# EAGLE board CT_schematic (EAGLE 7.6.0)

Size 100 x 80 mm. Coordinates in mm from the lower left corner, seen from the top.
Outline: 0,0 100,0 100,80 0,80 0,0
Copper layers (1*16): Top 0.035mm / dielectric 1.5mm / Bottom 0.035mm
Design rules "default": minimum track width 10mil, minimum drill 24mil, track to track 8mil, track to pad 8mil, pad to pad 8mil, via to via 8mil, smd to smd 8mil, copper to edge 40mil, drill to drill 8mil, minimum pad ring 10mil, minimum via ring 8mil, stop-mask expansion 4mil, vias tented up to drill 0mil, thermal gap 10mil

## Footprints (pad centres in the part's own frame; a part is rotated, then mirrored left to right if it is on the bottom)
C0603 = smd 0.8 x 0.8: 1 -0.762,0; 2 0.762,0
C0402 = smd 0.5 x 0.5: 1 -0.508,0; 2 0.508,0
C1206 = smd 1.3 x 1.6: 1 -1.524,0; 2 1.524,0
C0805 = smd 1.2 x 1.3: 1 -1.016,0; 2 1.016,0
EXV-9B = smd 2.718 x 1.778: 1 -2.108,0; 2 2.108,0
EXV-9H = smd 3.505 x 1.676: 1 -2.857,0; 2 2.857,0
L0603 = smd 0.8 x 0.8: 1 -0.762,0; 2 0.762,0
PJ-037B_PACKAGE = drill 3.7 square: 1 12,0 | drill 3.2 square: 2 6,0
R0603 = smd 0.8 x 0.8: 1 -0.762,0; 2 0.762,0
WLCSP64 = smd 0.34 x 0.34: A1 -1.75,1.75; A2 -1.25,1.75; A3 -0.75,1.75; A4 -0.25,1.75; A5 0.25,1.75; A6 0.75,1.75; A7 1.25,1.75; A8 1.75,1.75; B1 -1.75,1.25; B2 -1.25,1.25; B3 -0.75,1.25; B4 -0.25,1.25; B5 0.25,1.25; B6 0.75,1.25; B7 1.25,1.25; B8 1.75,1.25; C1 -1.75,0.75; C2 -1.25,0.75; C3 -0.75,0.75; C4 -0.25,0.75; C5 0.25,0.75; C6 0.75,0.75; C7 1.25,0.75; C8 1.75,0.75; D1 -1.75,0.25; D2 -1.25,0.25; D3 -0.75,0.25; D4 -0.25,0.25; D5 0.25,0.25; D6 0.75,0.25; D7 1.25,0.25; D8 1.75,0.25; E1 -1.75,-0.25; E2 -1.25,-0.25; E3 -0.75,-0.25; E4 -0.25,-0.25; E5 0.25,-0.25; E6 0.75,-0.25; E7 1.25,-0.25; E8 1.75,-0.25; F1 -1.75,-0.75; F2 -1.25,-0.75; F3 -0.75,-0.75; F4 -0.25,-0.75; F5 0.25,-0.75; F6 0.75,-0.75; F7 1.25,-0.75; F8 1.75,-0.75; G1 -1.75,-1.25; G2 -1.25,-1.25; G3 -0.75,-1.25; G4 -0.25,-1.25; G5 0.25,-1.25; G6 0.75,-1.25; G7 1.25,-1.25; G8 1.75,-1.25; H1 -1.75,-1.75; H2 -1.25,-1.75; H3 -0.75,-1.75; H4 -0.25,-1.75; H5 0.25,-1.75; H6 0.75,-1.75; H7 1.25,-1.75; H8 1.75,-1.75
SOT-23-8 = smd 0.4 x 1.2: 1 -0.975,-1.3; 2 -0.325,-1.3; 3 0.325,-1.3; 4 0.975,-1.3; 5 0.975,1.3; 6 0.325,1.3; 7 -0.325,1.3; 8 -0.975,1.3
182-009-MALE = drill 1.194 pad 1.524 octagon: 1 -5.537,10.923; 2 -2.769,10.923; 3 0,10.923; 4 2.769,10.923; 5 5.537,10.923; 6 -4.153,8.08; 7 -1.384,8.08; 8 1.384,8.08; 9 4.153,8.08 | hole 3.048: -12.446,9.501; 12.446,9.501
ABLS-25.000MHZ-B2F-T = smd 5.6 x 2.8: 1 -3.81,0; 2 5.69,0
ASEK = smd 1.4 x 1: 1 -1.1,-0.8; 2 1.1,-0.8; 3 1.1,0.8; 4 -1.1,0.8
WSON-8 = smd 0.3 x 0.6: 1 -0.75,0; 2 0.05,0; 3 0.85,0; 4 1.65,0; 5 1.65,3.8; 6 0.85,3.8; 7 0.05,3.8; 8 -0.75,3.8 | smd 3 x 2.6: PAD 0.45,1.9
LP2954 = smd 1.6 x 0.6: 1 -2.475,1.905 | smd 1.55 x 0.6: 2 -2.475,0.635; 3 -2.475,-0.635; 4 -2.475,-1.905; 5 2.475,-1.905; 6 2.475,-0.635; 7 2.475,0.635; 8 2.475,1.905
SON-6 = smd 0.55 x 0.3: 1 -0.355,0.5 | smd 0.52 x 0.3: 2 -0.37,0; 3 -0.37,-0.5; 4 0.37,-0.5; 5 0.37,0; 6 0.37,0.5
SW_4-1437565-2 = smd 1.4 x 2.1: 1 -2.23,4.55; 2 -2.23,-4.55; 3 2.23,4.55; 4 2.23,-4.55
LGM67K-G1J2-24-Z = smd 0.8 x 1.4: A -2,0; C 0,0
NC7SZ125M5X = smd 1.3 x 0.7: 1 -1.3,0.95; 2 -1.3,0; 3 -1.3,-0.95; 4 1.3,-0.95; 5 1.3,0.95

## Placement (x,y rotation side)
C1  1e-06  [C0603]  -43.18,59.69 0 top  (outside the outline)
C2  1e-07  [C0603]  -46.99,59.69 0 top  (outside the outline)
C3  1e-07  [C0603]  -50.8,59.69 0 top  (outside the outline)
C4  1e-07  [C0603]  -54.61,59.69 0 top  (outside the outline)
C5  1e-07  [C0603]  -58.42,59.69 0 top  (outside the outline)
C6  4.7e-06  [C0603]  -39.37,59.69 0 top  (outside the outline)
C7  1e-07  [C0603]  -62.23,59.69 0 top  (outside the outline)
C8  1e-07  [C0603]  -66.04,59.69 0 top  (outside the outline)
C9  1e-08  [C0603]  -15.24,64.77 0 top  (outside the outline)
C10  1e-06  [C0603]  -19.05,64.77 0 top  (outside the outline)
C11  1e-11  [C0402]  -45.72,64.77 0 top  (outside the outline)
C12  1e-11  [C0402]  -49.53,64.77 0 top  (outside the outline)
C13  1e-07  [C0402]  -53.34,64.77 0 top  (outside the outline)
C14  1e-08  [C0402]  -57.15,64.77 0 top  (outside the outline)
C15  1e-08  [C0402]  -60.96,64.77 0 top  (outside the outline)
C16  1e-05  [C1206]  -49.53,45.72 0 top  (outside the outline)
C17  1e-05  [C0805]  -30.48,53.34 0 top  (outside the outline)
C18  1e-06  [EXV-9B]  -60.96,45.72 0 top  (outside the outline)
C19  2.2e-06  [EXV-9B]  -16.51,53.34 0 top  (outside the outline)
C20  1e-07  [C0402]  -64.77,64.77 0 top  (outside the outline)
C21  0.0001  [EXV-9H]  -53.34,38.1 0 top  (outside the outline)
C22  0.0001  [EXV-9H]  -64.77,38.1 0 top  (outside the outline)
C23  1e-08  [C0402]  -68.58,64.77 0 top  (outside the outline)
F1  240.0  [L0603]  -22.86,64.77 0 top  (outside the outline)
J1  PJ-037B  [PJ-037B_PACKAGE]  -67.31,7.62 0 top  (outside the outline)
R2  1000.0  [R0603]  -26.67,64.77 0 top  (outside the outline)
R4  4700.0  [R0603]  -30.48,64.77 0 top  (outside the outline)
R5  10000.0  [R0603]  -15.24,59.69 0 top  (outside the outline)
R6  10000.0  [R0603]  -20.32,59.69 0 top  (outside the outline)
R7  120.0  [R0603]  -34.29,64.77 0 top  (outside the outline)
R8  100000.0  [R0603]  -40.64,53.34 0 top  (outside the outline)
R9  806.0  [R0603]  -38.1,64.77 0 top  (outside the outline)
R10  1000.0  [R0603]  -41.91,64.77 0 top  (outside the outline)
R11  100000.0  [R0603]  -45.72,53.34 0 top  (outside the outline)
R12  100000.0  [R0603]  -50.8,53.34 0 top  (outside the outline)
R13  164658.62  [R0603]  -35.56,53.34 0 top  (outside the outline)
R14  100000.0  [R0603]  -55.88,53.34 0 top  (outside the outline)
R15  10000.0  [R0603]  -25.4,59.69 0 top  (outside the outline)
R16  10000.0  [R0603]  -30.48,59.69 0 top  (outside the outline)
R17  82000.0  [R0603]  -35.56,59.69 0 top  (outside the outline)
R18  300000.0  [R0603]  -60.96,53.34 0 top  (outside the outline)
R19  120000.0  [R0603]  -66.04,53.34 0 top  (outside the outline)
U1  stm32f098rcy7  [WLCSP64]  -22.86,38.1 0 top  (outside the outline)
U2  MAX3051EKA+T  [SOT-23-8]  -54.61,44.45 0 top  (outside the outline)
U3  182-009-113R531  [182-009-MALE]  -36.83,6.35 0 top  (outside the outline)
U4  ABLS-25.000MHZ-B2F-T  [ABLS-25.000MHZ-B2F-T]  -26.67,46.99 0 top  (outside the outline)
U5  ASEK-2-32.768KHz-ECST  [ASEK]  -44.45,38.1 0 top  (outside the outline)
U6  LP3878SDX-ADJ/NOPB  [WSON-8]  -66.04,25.4 0 top  (outside the outline)
U7  LP2954AIMX/NOPB  [LP2954]  -44.45,27.94 0 top  (outside the outline)
U8  TPS3895ADRYR  [SON-6]  -13.97,68.58 0 top  (outside the outline)
U9  4-1437565-2  [SW_4-1437565-2]  -27.94,27.94 0 top  (outside the outline)
U10  Q65110A2395  [LGM67K-G1J2-24-Z]  -38.1,45.72 0 top  (outside the outline)
U11  nc7sz125m5x  [NC7SZ125M5X]  -24.13,53.34 0 top  (outside the outline)

## Library data of the parts
C1-C23 F1 J1 R2 R4-R19 U1-U11 = circuit_tree

## Nets
CLK_CRYSTAL_U1_D8: C11.1 U1.D8 U4.1
CLK_CRYSTAL_U1_E8: C12.1 U1.E8 U4.2
CLK_U1_C8: U1.C8 U5.3
GND: C1.2 C2.2 C3.2 C4.2 C5.2 C6.2 C7.2 C8.2 C9.2 C10.2 C11.2 C12.2 C13.2 C14.2 C15.2 C16.2 C17.2 C18.2 C19.2 C20.2 C21.2 C22.2 C23.2 J1.2 R2.2 R5.2 R6.2 R10.2 R14.2 R17.2 R19.2 U1.A7 U1.B2 U1.G7 U1.G8 U1.H2 U2.2 U2.8 U3.5 U5.2 U6.3 U6.PAD U7.4 U8.2 U10.C U11.1 U11.3
NET_U1_C6: R5.1 U1.C6
NET_U1_D7: R4.1 U1.D7 U11.4
NET_U1_H4: R6.1 U1.H4
NET_U1_H6: U10.A
NET_U1_H7: U9.3 U9.4
NET_U1_H8: C9.1 C10.1 F1.1 U1.H8
NET_U2_6: R7.2 U2.6
NET_U3_2: R7.2 U2.6 U3.2
NET_U3_3: R7.1 U2.7 U3.3
NET_U6_1: C15.1 U6.1
NET_U6_6: R9.2 R10.1 U6.6
NET_U6_8: R8.1 U6.8
NET_U7_3: R12.1 U7.3
NET_U7_5: R11.1 U7.5
NET_U7_7: R13.2 R14.1 U7.7
NET_U8_1: R16.1 R17.1 U8.1
NET_U8_3: R18.2 R19.1 U8.3
NET_U8_4: R15.1 U8.4 U11.2
NET_U9_1: R2.1 U9.1 U9.2
PROC_CAN_RX: U1.A6 U2.4
PROC_CAN_TX: U1.B1 U2.1
VCC_S1_10V7: C16.1 C18.1 C21.1 C22.1 J1.1 R8.2 R12.2 U6.4 U7.8
VCC_TIER1_1V8: C1.1 C2.1 C3.1 C4.1 C5.1 C6.1 C7.1 C14.1 C17.1 C20.1 C23.1 F1.2 R4.2 R9.1 R15.2 R16.2 R18.1 U1.A8 U1.B8 U1.G6 U1.H1 U5.4 U6.5 U8.6 U11.5
VCC_TIER1_3V3: C8.1 C13.1 C19.1 R11.2 R13.1 U1.A1 U2.3 U7.1

## Tracks (layer width: path | path; a pad name or v marks a point on that pad's centre or on a via)
CLK_CRYSTAL_U1_D8  (2 unrouted)
CLK_CRYSTAL_U1_E8  (2 unrouted)
CLK_U1_C8  (1 unrouted)
GND  (46 unrouted)
NET_U1_C6  (1 unrouted)
NET_U1_D7  (2 unrouted)
NET_U1_H4  (1 unrouted)
NET_U1_H7  (1 unrouted)
NET_U1_H8  (3 unrouted)
NET_U2_6  (1 unrouted)
NET_U3_2  (2 unrouted)
NET_U3_3  (2 unrouted)
NET_U6_1  (1 unrouted)
NET_U6_6  (2 unrouted)
NET_U6_8  (1 unrouted)
NET_U7_3  (1 unrouted)
NET_U7_5  (1 unrouted)
NET_U7_7  (2 unrouted)
NET_U8_1  (2 unrouted)
NET_U8_3  (2 unrouted)
NET_U8_4  (2 unrouted)
NET_U9_1  (2 unrouted)
PROC_CAN_RX  (1 unrouted)
PROC_CAN_TX  (1 unrouted)
VCC_S1_10V7  (8 unrouted)
VCC_TIER1_1V8  (24 unrouted)
VCC_TIER1_3V3  (7 unrouted)